# Altium PCB ESP32C3_BUTTON_LED_PCB.PcbDoc
Units mm, origin at the board's own origin, x right, y up, seen from the top; angles counter-clockwise.
Board outline 32 x 14.5 mm, 2 copper layers (Top Layer, Bottom Layer); 32 components, 20 nets, 113 pads, 72 vias.
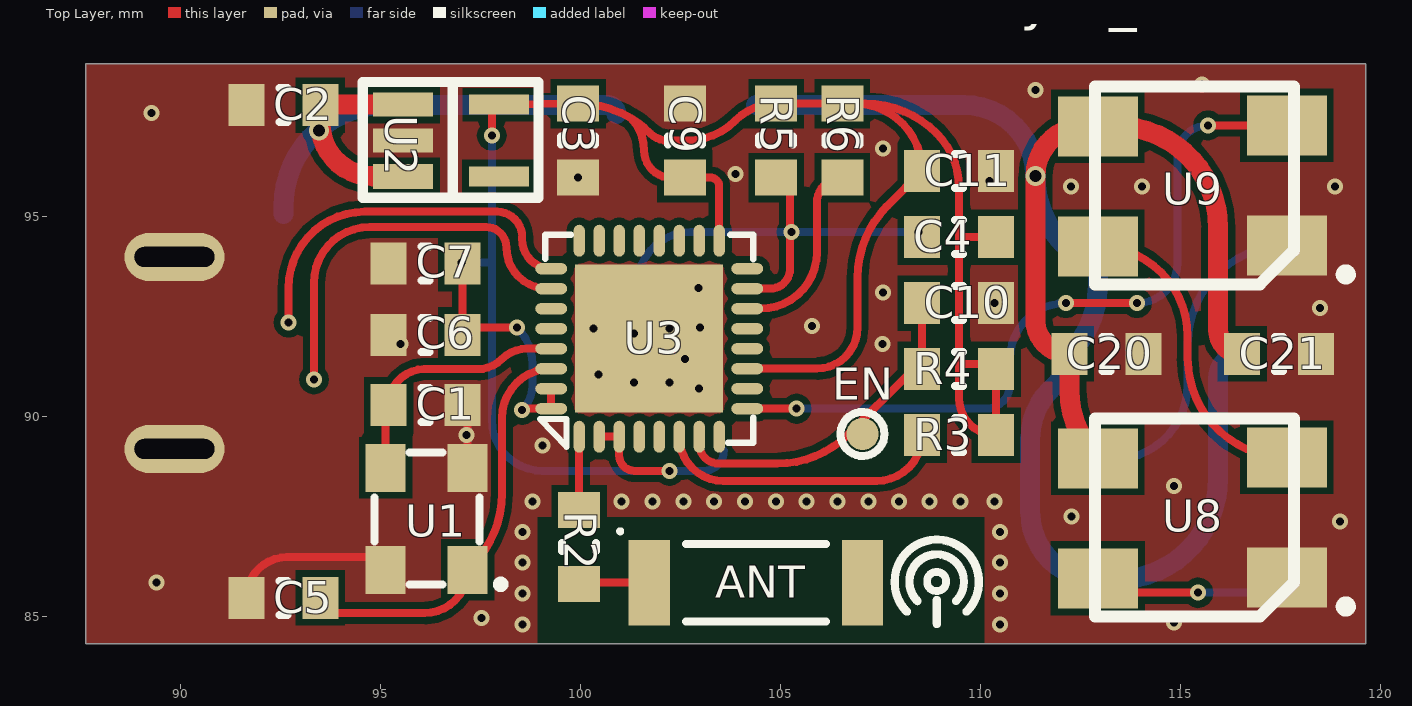
[diagram p0: Top Layer view]
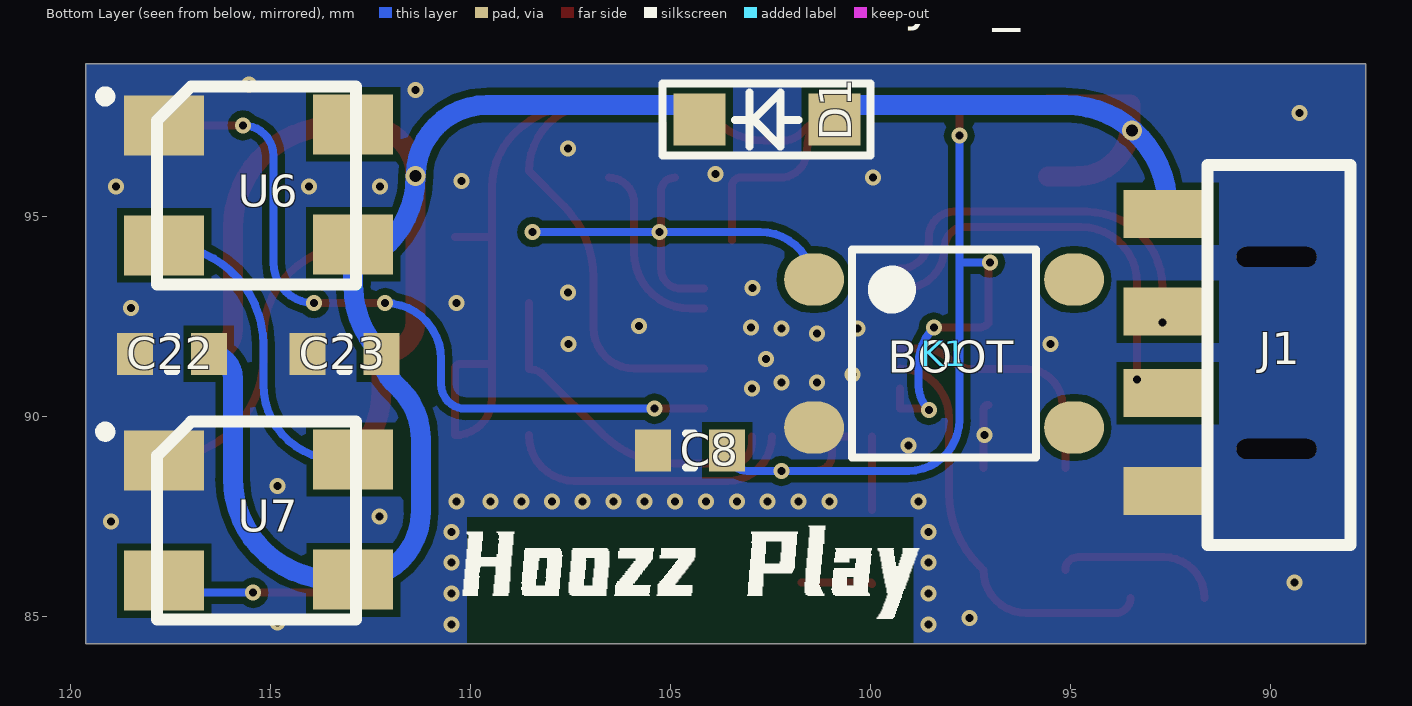
[diagram p1: Bottom Layer view, seen from below]

## Layer stack, top to bottom
Top Solder: solder mask 0.0102, Solder Resist, Dk 3.5
Top Layer: signal copper 0.0356
Dielectric 1: dielectric 0.32, FR-4, Dk 4.8
Bottom Layer: signal copper 0.0356
Bottom Solder: solder mask 0.0102, Solder Resist, Dk 3.5

## Board outline
87.634,84.328 87.634,98.828 119.634,98.828 119.634,84.328

## Design rules (kind name [scope] priority, off if disabled: settings)
Clearance [All] p1: gap=0.175 ignorepadtopadclearanceinfootprint=FALSE except(0: Arc-Hole Track-Hole SMDPad-Hole THPad-Hole Via-Hole Fill-Hole Poly-Hole Region-Hole Text-Hole)
PlaneConnect [All] p1: planeconnectstyle=Direct reliefexpansion=0.508 reliefentries=4 reliefconductorwidth=0.254 reliefairgap=0.254
PolygonConnect [All] p1: connectstyle=Direct reliefconductorwidth=0.254 reliefentries=4 polygonreliefangle="90 Angle" airgapwidth=0.254
RoutingVias [All] p1: holewidth=0.711 width=1.27 viastyle="Through Hole" minholewidth=0.711 minwidth=1.27 maxholewidth=0.711 maxwidth=1.27
SolderMaskExpansion [All] p1: expansion=0.102
Width [All] p1: maxlimit=1 minlimit=0.2 preferedwidth=0.254
29 further rules are at their usual default settings.

## Classes and differential pairs
component class ESP32C3_BUTTON_LED_WS2812B_Sheet: C20 C21 C22 C23 D1 U6 U7 U8 U9
component class ESP32C3_BUTTON_LED_MCU_Sheet: ANT C1 C2 C3 C4 C5 C6 C7 C8 C9 C10 C11 EN J1 K1 R2 R3 R4 R5 R6 U1 U2 U3

## Components (designator, comment, footprint, x,y, rotation, side; value= is the part's Value field where it differs from the comment)
ANT "ANT" CA-C03 104.394,85.852 r0 top
C1 "Cap" 0603 96.139,90.297 r0 top value=16pF
C2 "Cap" 0603 92.583,97.79 r0 top value=1uF
C3 "Cap" 0603 99.949,96.901 r90 top value=10uF
C4 "Cap" 0603 109.474,94.488 r180 top value=100nF
C5 "Cap" 0603 92.583,85.471 r0 top value=16pF
C6 "Cap" 0603 96.139,92.047 r0 top value=1uF
C7 "Cap" 0603 96.139,93.825 r0 top value=10nF
C8 "Cap" 0603 104.521,89.154 r180 bottom value=100nF
C9 "Cap" 0603 102.616,96.901 r270 top value=100nF
C10 "Cap" 0603 109.474,92.837 r180 top value=1uF
C11 "Cap" 0603 109.474,96.139 r180 top value=100nF
C20 "Cap" 0603 113.157,91.567 r0 top value=10uF
C21 "Cap" 0603 117.475,91.567 r0 top value=10uF
C22 "Cap" 0603 117.475,91.567 r0 bottom value=10uF
C23 "Cap" 0603 113.157,91.567 r0 bottom value=10uF
D1 "1N4007/A7" SOD-123FL 102.579,97.409 r0 bottom
EN "TEST-PORT" TEST-PORT 107.059,89.567 r90 top
J1 "USBA" USB-A-2 90.308,91.567 r270 bottom
K1 "BOOT" TS-C005 98.171,91.578 r180 bottom
R2 "Res" 0603 99.977,86.741 r270 top value=0R
R3 "Res" 0603 109.474,89.535 r0 top value=4.7K
R4 "Res" 0603 109.474,91.186 r0 top value=10K
R5 "Res" 0603 104.902,96.901 r90 top value=10K
R6 "Res" 0603 106.553,96.901 r90 top value=10K
U1 "40MHz" 3225 96.139,87.432 r90 top
U2 "ME6211-3.3" SOT-23-5 96.774,96.901 r270 top
U3 "ESP32-C3FH4AZ" QFN32_3.7X3.7 101.727,91.948 r90 top
U6 "WS2812B" 5050 115.316,95.631 r0 bottom
U7 "WS2812B" 5050 115.316,87.249 r0 bottom
U8 "WS2812B" 5050 115.316,87.63 r0 top
U9 "WS2812B" 5050 115.316,95.932 r0 top

## Footprints (in the part's own frame and the unit in brackets; to place one, negate y for a bottom-side part, rotate by r counter-clockwise, add the part's x,y. Pads: shape width x height; smd on the part's side, far side on the other; paste and mask are expansions set on the pad)
0603 [mm] "2-Leads, Body 2.00x1.00mm, IPC Medium Density"
  rect 0.9x1.05 smd: 1(-0.925,0) 2(0.925,0)
  silkscreen extent -0.1,-0.43 0.1,0.43, body extent -1,-0.5 1,0.5, height 0.6
3225 [mm]
  rect 1.2x1 smd: 1(-1.26,-1.05) 2(1.29,-1.04) 3(1.29,1) 4(-1.26,1)
  silkscreen extent -1.72,-1.97 1.68,1.28, body extent -1.63,-1.35 1.68,1.28, height 1
5050 [mm]
  rect 2x1.5 smd: 1(-2.375,1.325) 2(-2.375,-1.675) 3(2.35,-1.65) 4(2.35,1.35)
  silkscreen extent -2.45,-2.62 3.95,2.33, body extent -2.45,-2.65 2.52,2.32, height 1.5
CA-C03 [mm] "ANT, SMD, 2-Leads, Body 5.50x2.00mm, IPC Medium Density"
  rect 1.03x2.14 smd: 1(-2.665,0) 2(2.665,0)
  silkscreen extent -3.44,-0.97 1.75,1.33, body extent -2.8,-1.05 2.8,1.05, height 1
QFN32_3.7X3.7 [mm]
  oval 0.8x0.28 smd: 1(-2.45,1.75) 2(-2.45,1.25) 3(-2.45,0.75) 4(-2.45,0.25) 5(-2.45,-0.25) 6(-2.45,-0.75) 7(-2.45,-1.25) 8(-2.45,-1.75) 17(2.45,-1.75) 18(2.45,-1.25) 19(2.45,-0.75) 20(2.45,-0.25) 21(2.45,0.25) 22(2.45,0.75) 23(2.45,1.25) 24(2.45,1.75)
  oval 0.28x0.8 smd: 9(-1.75,-2.45) 10(-1.25,-2.45) 11(-0.75,-2.45) 12(-0.25,-2.45) 13(0.25,-2.45) 14(0.75,-2.45) 15(1.25,-2.45) 16(1.75,-2.45) 25(1.75,2.45) 26(1.25,2.45) 27(0.75,2.45) 28(0.25,2.45) 29(-0.25,2.45) 30(-0.75,2.45) 31(-1.25,2.45) 32(-1.75,2.45)
  rect 3.7x3.7 smd: 33(0,0)
  silkscreen extent -2.71,-2.6 2.6,2.73, body extent -2.35,-2.35 2.42,2.4, height 0.8
SOD-123FL [mm]
  rect 1.3x1.3 smd: A(-1.675,-0.025) K(1.7,-0.025)
  silkscreen extent -2.58,-0.93 2.62,0.87, body extent -1.75,-0.92 1.75,0.88, height 1
SOT-23-5 [mm]
  rect 0.6x1.5 smd: 1(-0.9,-1.2) 2(0,-1.2)
  rect 0.63x1.5 smd: 3(0.9,-1.2)
  rect 0.5x1.5 smd: 4(0.9,1.2) 5(-0.9,1.2)
  silkscreen extent -1.47,-2.21 1.43,2.18, body extent -1.38,-0.95 1.3,0.9, height 1
TEST-PORT [mm] "Test port"
  round 0.8 smd: T(0,0)
  silkscreen extent -0.55,-0.55 0.55,0.55
TS-C005 [mm] "4mm*4mm*1.5mm"
  oval 1.5x1.3 smd: 1(-3.25,1.85) 2(-3.25,-1.85) 3(3.25,-1.85) 4(3.25,1.85)
  silkscreen extent -2.3,-2.6 2.3,2.6, body extent -2.6,-2.6 2.6,2.6, height 1.3
USB-A-2 [mm]
  rect 1.2x2.2 smd: 1(-3.5,-2.275) 2(-1.06,-2.275) 3(0.98,-2.275) 4(3.42,-2.275)
  oval 0.5x2 / inner oval 1.2x2.5 / far side oval 1.2x2.5 hole 0.5 slot 2 at 90 deg: ""(-2.425,0.45) ""(2.375,0.45)
  silkscreen extent -4.72,-1.27 4.78,2.3

## Part data
C1 C2 C3 C4 C5 C6 C7 C8 C9 C10 C11 C20 C21 C22 C23: "Capacitor", LatestRevisionDate=17-Jul-2002, LatestRevisionNote="Re-released for DXP Platform.", PackageDescription="Radial Cap, Thru-Hole; 2 Leads; 0.3 in Pin Spacing", PackageReference=RAD-0.3, Published=8-Jun-2000, Publisher="Altium Limited"
D1: library part DIODE
J1: "USB2.0"
K1: library part BUTTON
R2 R3 R4 R5 R6: "Resistor", LatestRevisionDate=29-May-2009, LatestRevisionNote="IPC-7351 Footprint Added.", PackageDescription="Chip Resistor", PackageReference=J1-0603, Published=8-Jun-2000, Publisher="Altium Limited"
U1: library part XTAL2
U2: "No Description Available", Manufacturer="Texas Instruments", Manufacturer_Part_Number=REG102NA-2.5/250, Built_By=EMA_UL_Team, Copyright="Copyright (C) 2018 Accelerated Designs. All rights reserved", RefDes=RefDes, SourceLibrary=TI_2016-07-06, Type=DEV, Vendor="Texas Instruments"

## Via types
v1: diameter 0.4, hole 0.2, Top Layer to Bottom Layer, 60 vias
v2: diameter 0.4/0.4 (per signal layer), hole 0.2, Top Layer to Bottom Layer, 10 vias
v3: diameter 0.5, hole 0.3, Top Layer to Bottom Layer, 2 vias

## Nets (pads, with @x,y where several pads share a name; then routed paths per layer and width w, separated by ;. In a path a pad name is that pad's centre, name@x,y a point inside that pad or via, vN(x,y) a via of type N, cw(c..) or ccw(c..) an arc to the next point about the centre after c; other vN are vias at no path point)
DOUT: U3.9 U9.4 | length 19
  Top Layer w0.2: U3.9 v1(105.41,90.198) ; v1(112.141,92.837) v1(113.919,92.837) ; v1@115.697,97.257 v1(115.697,97.282) U9.4
  Bottom Layer w0.2: v1(105.41,90.198) 110.137,90.198 ccw(c110.137,90.805) 110.744,90.805 110.744,91.44 cw(c112.141,91.44) v1(112.141,92.837) ; v1(113.919,92.837) ccw(c113.919,93.853) 114.935,93.853 114.935,96.52 cw(c115.697,96.52) v1(115.697,97.282)
GND: C1.2 C2.1 C3.1 C5.1 C6.1 C7.1 C8.1 C9.1 C10.1 C11.1 C20.2 C21.2 C22.2 C23.2 J1. J1.4 K1.2 U1.2 U1.4 U2.2 U3.33 U6.3 U7.3 U8.3 U9.3 | length 5.9
  Top Layer w0.2: C5.1 cw(c92.674,85.471) 92.674,86.487 94.824,86.487 cw(c94.824,86.172) U1.4 ; C1.2 cw(c97.064,90.182) 97.179,90.182 U1.2
  other v1: 98.554,84.808 110.49,84.808 114.84,84.85 97.536,84.963 98.554,85.58 110.49,85.58 89.408,85.852 98.554,86.351 110.49,86.351 98.554,87.122 110.49,87.122 118.999,87.376 112.287,87.503 98.806,87.884 101.037,87.884 101.808,87.884 102.579,87.884 103.35,87.884 104.122,87.884 104.893,87.884 105.664,87.884 106.435,87.884 107.206,87.884 107.968,87.884 108.74,87.884 109.511,87.884 110.363,87.884 114.84,88.264 99.06,89.281 97.155,89.535 102.977,90.698 101.346,90.855 102.235,90.855 100.457,91.059 102.616,91.44 95.504,91.821 101.346,92.075 100.33,92.202 102.235,92.202 102.997,92.224 118.491,92.71 110.363,92.837 102.961,93.218 112.268,95.758 114.046,95.758 118.872,95.758 110.236,95.885 99.949,95.976 89.281,97.585 111.379,98.171 115.551,98.298
  other v2: 107.558,91.821 105.791,92.267 107.569,93.103 103.886,96.067 107.569,96.702
NetANT_1: ANT.1 R2.2 | length 1.8
  Top Layer w0.2: R2.2 cw(c100.013,85.816) 100.013,85.852 ANT.1
NetC1_1: C1.1 U1.3 U3.29 | length 6.3
  Top Layer w0.2: U1.3 95.139,90.222 cw(c95.214,90.222) C1.1 cw(c96.103,90.297) 96.103,91.186 97.431,91.186 ccw(c97.431,92.053) 98.044,91.44 cw(c98.667,90.817) 98.667,91.698 U3.29
NetC4_2: C4.2 K1.1 R5.1 U3.15 | length 11.6
  Top Layer w0.2: U3.15 104.746,93.198 ccw(c104.746,93.698) 105.246,93.698 105.246,95.632 ccw(c104.902,95.632) R5.1
  Bottom Layer w0.2: K1.1@101.421,93.265 cw(c102.77,93.265) 102.77,94.615 v2(105.283,94.615) v2(108.458,94.615)
NetC5_2: C5.2 U1.1 U3.30 | length 10.5
  Top Layer w0.2: C5.2 ccw(c93.889,85.471) 93.889,85.09 96.107,85.09 ccw(c96.107,86.172) U1.1 97.3,86.283 ccw(c95.504,88.079) 98.044,88.079 98.044,89.965 cw(c99.277,89.965) U3.30
NetC10_2: C10.2 EN.T R4.1 U3.7 | length 8.5
  Top Layer w0.2: U3.7 102.977,89.323 ccw(c103.477,89.323) 103.477,88.823 104.916,88.823 ccw(c104.916,91.363) 106.712,89.567 108.177,91.032 cw(c108.549,90.66) R4.1 C10.2
NetR2_1: R2.1 U3.1 | length 1.8
  Top Layer w0.2: R2.1 U3.1
NetR3_1: R3.1 U3.6 | length 7.4
  Top Layer w0.2: U3.6 ccw(c103.583,89.498) 103.583,88.392 107.406,88.392 ccw(c107.406,89.535) R3.1
NetR6_1: R6.1 U3.14 | length 4.8
  Top Layer w0.2: U3.14 104.509,92.698 ccw(c104.509,94.107) 105.918,94.107 105.918,95.341 cw(c106.553,95.341) R6.1
NetU6_4: U6.4 U7.2 | length 8.2
  Bottom Layer w0.2: U7.2 113.308,88.924 ccw(c113.308,90.805) 115.189,90.805 115.189,91.804 cw(c117.666,91.804) U6.4
NetU7_4: U7.4 U8.2 | length 5.1
  Top Layer w0.2: U8.2 ccw(c113.298,85.955) 113.298,85.598 v1(115.443,85.598)
  Bottom Layer w0.2: v1(115.443,85.598) 117.365,85.598 ccw(c117.365,85.899) U7.4
NetU8_4: U8.4 U9.2 | length 8
  Top Layer w0.2: U9.2 cw(c112.941,92.009) 115.189,92.009 115.189,91.457 ccw(c117.666,91.457) U8.4
POWER: C20.1 C21.1 C22.1 C23.1 D1.K U6.1 U7.1 U8.1 U9.1 | length 46
  Top Layer w0.5: U8.1 cw(c114.653,90.667) 112.232,90.667 C20.1 cw(c112.232,92.42) 111.379,92.42 v3(111.379,96.012) cw(c112.624,96.012) 112.624,97.257 U9.1 113.411,97.257 cw(c113.411,94.717) 115.951,94.717 115.951,92.166 ccw(c116.55,92.166) C21.1
  Bottom Layer w0.5: D1.K@104.394,97.79 109.601,97.79 cw(c109.601,96.012) v3(111.379,96.012) ccw(c113.762,96.012) 112.077,94.327 U6.1@112.377,94.027 ; U6.1 112.941,93.279 cw(c110.52,93.279) C23.1 cw(c111.225,91.567) 111.937,90.855 111.76,90.678 ccw(c112.986,89.452) 111.252,89.452 111.252,87.613 ccw(c112.941,87.613) U7.1 113.411,85.924 ccw(c113.411,88.464) 115.951,88.464 115.951,90.968 cw(c116.55,90.968) C22.1
UART_RX: U3.27
UART_TX: U3.28
USB_D+: J1.3 U3.26 | length 10
  Top Layer w0.2: v2(93.345,90.932) 93.345,93.344 cw(c94.742,93.344) 94.742,94.741 97.649,94.741 cw(c97.649,94.234) 98.155,94.234 ccw(c99.191,94.234) 99.191,93.198 U3.26
USB_D-: J1.2 U3.25 | length 9.4
  Top Layer w0.2: v2(92.71,92.351) 92.71,93.218 cw(c94.615,93.218) 94.615,95.123 97.917,95.123 cw(c97.917,94.488) 98.552,94.488 98.552,94.423 ccw(c99.277,94.423) U3.25
VDD3V3: C3.2 C4.1 C6.2 C7.2 C8.2 C9.2 C11.2 R3.2 R4.2 R5.2 R6.2 U2.5 U3.2 U3.3 U3.11 U3.17 U3.31 U3.32 | length 62.6
  Top Layer w0.2: C7.2 97.064,92.329 ccw(c97.318,92.583) 97.318,92.224 v1(98.425,92.224) ; v1(97.79,97.028) U2.5@97.79,97.803 ; U2.5@98.171,97.803 C3.2 ; v1(98.552,90.17) cw(c98.58,90.17) 98.58,90.198 U3.32 U3.31 ; U3.2 U3.3 100.977,89.027 ccw(c101.358,89.027) 101.358,88.646 v1(102.235,88.646) ; U3.17 103.477,95.75 ccw(c103.251,95.75) 103.251,95.976 C9.2 102.271,95.976 cw(c102.271,96.647) 101.6,96.647 ccw(c100.421,96.647) 101.28,97.455 ; U3.11 105.908,91.198 ccw(c105.908,92.224) 106.934,92.224 106.934,93.472 cw(c109.474,93.472) 107.678,95.268 C11.2 ccw(c106.862,96.139) R6.2@106.862,97.826 ; C4.1 109.474,94.488 ; C3.2 cw(c99.949,96.683) C3.2@99.958,97.826 ; C3.2 C3.2@99.958,97.826 ; C3.2@99.958,97.826 cw(c99.958,95.286) 101.28,97.455 ; 101.28,97.455 cw(c99.958,95.286) 101.754,97.082 ccw(c102.191,97.519) 102.191,96.901 102.669,96.901 ccw(c102.669,98.613) 103.879,97.402 cw(c104.902,96.38) R5.2 R6.2 R6.2@106.862,97.826 ; R6.2@106.862,97.826 107.116,97.826 cw(c107.116,95.286) 108.912,97.082 cw(c107.555,95.725) 109.474,95.725 109.474,94.488 ; 109.474,91.313 109.474,90.46 ccw(c110.399,90.46) R3.2 R4.2 ccw(c110.272,91.186) 110.272,91.313 109.474,91.313 ; 109.474,91.313 109.474,94.488
  Bottom Layer w0.2: v2(97.028,93.853) 97.79,93.853 ; v1(97.79,97.028) 97.79,93.853 ; v1(98.425,92.224) cw(c97.505,91.304) 98.806,91.304 98.806,90.783 cw(c97.939,90.783) v1(98.552,90.17) ; C8.2 cw(c103.088,89.154) 103.088,88.646 v1(102.235,88.646) 99.06,88.646 cw(c99.06,89.916) 97.79,89.916 97.79,93.853
VDD5V: C2.2 D1.A J1.1 U2.1 U2.3 | length 15.5
  Top Layer w0.5: U2.3 94.824,96.001 94.824,96.012 cw(c94.824,97.328) 93.508,97.328 C2.2 93.508,97.801 U2.1
  Bottom Layer w0.5: J1.1 92.583,95.25 cw(c95.123,95.25) 95.123,97.79 100.675,97.79 cw(c100.675,97.561) D1.A@100.904,97.561
  other v3: 93.472,97.155
pads on no net: ANT.2 K1.3 K1.4 U2.4 U3.4 U3.5 U3.8 U3.10 U3.12 U3.13 U3.16 U3.18 U3.19 U3.20 U3.21 U3.22 U3.23 U3.24 U6.2

## Polygon pours and split planes (outlines as drawn)
GND on Bottom Layer "GND_L02_P005" (solid, remove dead copper, pour order 5): 87.634,84.328 87.634,98.828 119.634,98.828 119.634,84.328
GND on Top Layer "GND_L01_P006" (solid, remove dead copper, pour order 6): 87.634,84.328 87.634,98.828 119.634,98.828 119.634,84.328

## Other copper
Top Layer:
  pour cut-out: 98.933,87.503 98.933,84.328 110.109,84.328 110.109,87.503
Bottom Layer:
  pour cut-out: 98.933,87.503 98.933,84.328 110.109,84.328 110.109,87.503

## Silkscreen, mask and mechanical layers (free items; w line width, h text height)
Top Overlay:
  drawing of 4 lines, arcs and shapes, not listed
  text ".Layer_Name" at 108.966,99.949 h1
Bottom Overlay:
  drawing of 9 lines, arcs and shapes, not listed
  text ".Layer_Name" at 101.221,99.949 h1
Mechanical 1:
  the board outline again, w0.2